# EAGLE board SparkFun_9DoF_ISM330DLC-MMC5983MA_Qwiic_Micro (EAGLE 9.6.2)
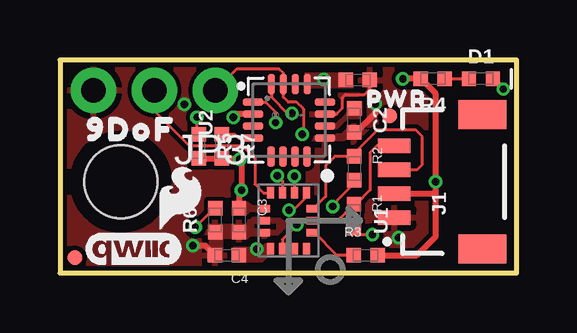
[diagram p0: board, top side]
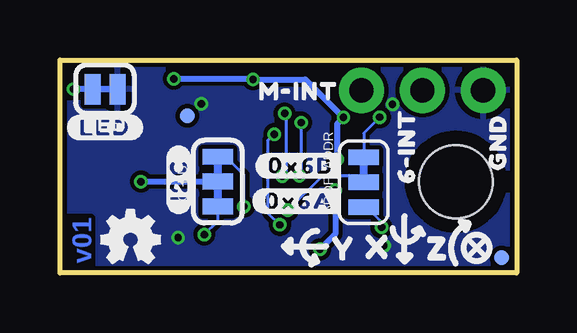
[diagram p1: board, bottom side, seen from below]

Size 19.05 x 8.89 mm. Coordinates in mm from the lower left corner, seen from the top.
Outline: 19.05,8.89 0,8.89 0,0 19.05,0 19.05,8.89
Copper layers (1*16): Top 0.035mm / dielectric 1.5mm / Bottom 0.035mm
Design rules "SparkFun-2-Layer-Minimum-JLCPCB": minimum track width 5mil, minimum drill 0.3mm, track to track 5mil, track to pad 5mil, pad to pad 5mil, via to via 5mil, smd to smd 5mil, copper to edge 7mil, drill to drill 7mil, minimum pad ring 5mil, minimum via ring 5mil, stop-mask expansion 2.5mil, vias tented up to drill 25mil, thermal gap 10mil
tRestrict: area 8.4,1.9 to 8.7,2

## Footprints (pad centres in the part's own frame; a part is rotated, then mirrored left to right if it is on the bottom)
SMT-JUMPER_3_1-NC_TRACE_SILK = smd 0.66 x 1.27: 1 -1.041,0; 2 0,0; 3 1.041,0
0402-TIGHT = smd 0.6 x 0.6: 1 -0.5,0; 2 0.5,0
0402-TIGHT' = smd 0.6 x 0.6: A -0.5,0; C 0.5,0
FIDUCIAL-MICRO = smd 0.635 x 0.635: 1 0,0
SMT-JUMPER_3_2-NC_TRACE_SILK = smd 0.66 x 1.27: 1 -1.041,0; 2 0,0; 3 1.041,0
JST04_1MM_RA = smd 0.6 x 1.35: 1 -1.5,0; 2 -0.5,0; 3 0.5,0; 4 1.5,0 | smd 1.2 x 2: NC1 2.8,-3.675; NC2 -2.8,-3.675
1X03_NO_SILK = drill 1.016 pad 1.88: 1 0,0; 2 2.54,0; 3 5.08,0
SMT-JUMPER_2_NC_TRACE_SILK = smd 0.66 x 1.27: 1 -0.521,0; 2 0.521,0
STAND-OFF-TIGHT = hole 3.048: 0,0
LGA-14L = smd 0.48 x 0.3: P1 -1.163,0.75; P2 -1.163,0.25; P3 -1.163,-0.25; P4 -1.163,-0.75; P8 1.163,-0.75; P9 1.163,-0.25; P10 1.163,0.25; P11 1.163,0.75 | smd 0.3 x 0.48: P5 -0.5,-1; P6 0,-1; P7 0.5,-1; P12 0.5,1; P13 0,1; P14 -0.5,1
LGA-16-3X3MM-4X4PINS = smd 0.3 x 0.85: 1 0.754,1.498; 2 0.254,1.498; 3 -0.246,1.498; 4 -0.746,1.498; 9 -0.746,-1.506; 10 -0.246,-1.506; 11 0.254,-1.506; 12 0.754,-1.506 | smd 0.85 x 0.3: 5 -1.508,0.746; 6 -1.508,0.246; 7 -1.508,-0.254; 8 -1.508,-0.754; 13 1.496,-0.764; 14 1.496,-0.264; 15 1.496,0.236; 16 1.496,0.736

## Placement (x,y rotation side)
6DOF_ADDR  JUMPER-SMT_3_1-NC_TRACE_SILK  [SMT-JUMPER_3_1-NC_TRACE_SILK]  6.38,3.78 90 bottom
C1  1.0uF  [0402-TIGHT]  12.42,8.05 0 top
C2  10uF  [0402-TIGHT]  12.27,6.38 270 top
C3  0.1uF  [0402-TIGHT]  7.47,2.2 270 top
C4  0.1uF  [0402-TIGHT]  6.96,0.74 180 top
D1  RED  [0402-TIGHT']  17.55,8.1 0 top
FD1  FIDUCIALUFIDUCIAL  [FIDUCIAL-MICRO]  0.64,0.64 0 bottom
FD2  FIDUCIALUFIDUCIAL  [FIDUCIAL-MICRO]  13.74,6.55 0 bottom
FID1  FIDUCIALUFIDUCIAL  [FIDUCIAL-MICRO]  0.64,0.64 0 top
FID2  FIDUCIALUFIDUCIAL  [FIDUCIAL-MICRO]  13.74,6.55 0 top
FRAME2  FRAME-LEDGER  [CREATIVE_COMMONS]  -19.05,-20.32 0 top  (outside the outline)
I2C_PU  S_MODE  [SMT-JUMPER_3_2-NC_TRACE_SILK]  12.47,3.81 90 bottom
J1  QWIIC_RIGHT_ANGLE  [JST04_1MM_RA]  13.94,3.81 90 top
JP3  IO  [1X03_NO_SILK]  6.48,7.62 180 top
LED  JUMPER-SMT_2_NC_TRACE_SILK  [SMT-JUMPER_2_NC_TRACE_SILK]  17.17,7.67 180 bottom
LOGO1  QWIIC_LOGO_4MM  [QWIIC_4MM]  3.07,0.99 0 top
LOGO2  OSHW-LOGOMINI  [OSHW-LOGO-MINI]  16.1,1.4 0 bottom
LOGO3  SFE_LOGO_NAMEBLANK  [BLANK]  -39.37,-21.59 0 top  (outside the outline)
R1  2.2k  [0402-TIGHT]  12.26,2.36 270 top
R2  2.2k  [0402-TIGHT]  12.27,4.37 270 top
R3  100k  [0402-TIGHT]  12.74,0.74 0 top
R4  1k  [0402-TIGHT]  15.54,8.1 180 top
R5  100k  [0402-TIGHT]  5.79,5.28 270 top
R6  100k  [0402-TIGHT]  6.48,2.21 90 top
R7  100k  [0402-TIGHT]  6.76,5.28 270 top
STANDOFF2  STAND-OFFTIGHT  [STAND-OFF-TIGHT]  2.54,3.81 0 top
U1  ISM330DHCX  [LGA-14L]  9.53,2.18 270 top
U2  MMC5983MA_QFN16  [LGA-16-3X3MM-4X4PINS]  9.55,6.38 90 top
U$1  [GND4]  0.79,5.46 90 bottom
U$2  [M#INT8]  9.08,7.58 0 bottom
U$3  [6#INT8]  4.6,5.31 90 bottom
U$4  [#0X6A#13]  9.07,3 0 bottom
U$5  [#0X6B#13]  9.02,4.47 0 bottom
U$6  [9DOF5985]  2.97,5.99 0 top
U$16  [#LED#11]  17.17,6.07 0 bottom
U$25  [#I2C#11]  14.1,3.89 90 bottom
U$28  [PWR8]  14.05,7.26 0 top
U$29  [SFE_LOGO_FLAME_.1]  5,3.15 0 top
U$37  [X2114]  5.77,1.07 0 bottom
U$38  [Y2115]  7.19,1.02 0 bottom
U$39  [Z2116]  3.28,1.02 0 bottom

## Library data of the parts
6DOF_ADDR I2C_PU LED = SparkFun-Jumpers
C1 = SparkFun-Capacitors; PROD_ID: CAP-12417
C2 = SparkFun-Capacitors; PROD_ID: CAP-14848
C3 C4 = SparkFun-Capacitors; PROD_ID: CAP-12416
D1 = ISM330DHCX
FD1 FD2 FID1 FID2 FRAME2 LOGO1-LOGO3 U$29 = SparkFun-Aesthetics
J1 = SparkFun-Connectors; PROD_ID: CONN-13694
JP3 = SparkFun-Connectors
R1 R2 = SparkFun-Resistors; PROD_ID: RES-14341
R3 R5-R7 = SparkFun-Resistors; PROD_ID: RES-13495
R4 = SparkFun-Resistors; PROD_ID: RES-14342
STANDOFF2 = SparkFun-Hardware
U1 = ISM330DHCX; PROD_ID: IC-16693
U2 = SparkFun-Sensors; PROD_ID: IC-16314
U$1-U$6 = LISMini
U$16 U$25 = bot
U$28 = top
U$37-U$39 = ISMTopMini

## Nets
3.3V: C1.1 C3.1 C4.1 I2C_PU.2 J1.2 R3.2 R4.2 R5.2 R7.2 U1.P5 U1.P8 U2.2 U2.13
!ISM_CS!: R3.1 U1.P12
!MAG_CS!: R7.1 U2.4
CAP: C2.1 U2.10
GND: C1.2 C2.2 C3.2 C4.2 J1.1 JP3.3 LED.1 R6.1 U1.P6 U1.P7 U2.9 U2.11
ISM_INT: JP3.2 U1.P4
ISM_SCL: U1.P3 U2.1
ISM_SDA: U1.P2 U2.16
MAG_INT: JP3.1 U1.P9 U2.15
N$1: 6DOF_ADDR.3 R5.1
N$2: D1.A R4.1
N$3: D1.C LED.2
N$5: I2C_PU.1 R1.2
N$6: I2C_PU.3 R2.2
N$7: 6DOF_ADDR.1 R6.2
POCI/SA0: 6DOF_ADDR.2 U1.P1
SCL: J1.4 R1.1 U1.P13
SDA: J1.3 R2.1 U1.P14

## Tracks (layer width: path | path; a pad name or v marks a point on that pad's centre or on a via)
3.3V  (via drill 0.3)
  Top 0.254: 15.67,3.35 v15.67,3.81 15.67,7.48 R4.2 v14.3,8.1 | R5.2 R7.2 6.79,4.75 v7.49,4.75 7.57,4.67 v7.57,3.45 7.47,3.35 C3.1 | U2.2 7.34,6.63 7.23,6.51 v7.23,6.49 | R3.2 14.88,0.74 15.67,1.52 15.67,3.35 | 15.67,3.35 15.63,3.31 J1.2
  Bottom 0.254: v14.3,8.1 11.02,8.1 v11,8.08 8.81,8.08 v7.23,6.49 7.49,6.22 v7.49,4.75 | v15.67,3.81 I2C_PU.2 | v7.57,3.45 7.57,1.63 v8.2,0.99
  pour Top (isolate 0.178, no thermals): 10.21,8.33 10.24,8.36 12.22,8.36 12.22,7.72 10.21,7.72
  pour Top (isolate 0.178, no thermals): 8.66,2.54 7.9,2.54 7.77,2.41 7.21,2.41 7.21,2.97 7.85,2.97 8,2.82 8.66,2.82
  pour Top (isolate 0.178, no thermals): 8.56,1.22 8.41,1.07 7.24,1.07 7.24,0.46 8.46,0.46 8.92,0.91 8.92,1.22
!ISM_CS!
  Top 0.127: R3.1 11.56,0.74 10.61,1.68 U1.P12
!MAG_CS!
  Top 0.127: U2.4 7.45,5.63 7.3,5.78 R7.1
CAP
  pour Top (isolate 0.178, no thermals): 10.82,6.25 11.53,6.25 11.94,6.65 11.94,7.16 12.57,7.16 12.6,7.14 12.6,6.58 12.45,6.43 11.99,6.43 11.56,5.99 10.85,5.99 10.82,6.02
GND  (via drill 0.3)
  Top 0.127: U2.11 11.53,6.63 11.78,6.88 11.78,7.25 11.79,7.26 11.79,7.32 11.91,7.44 12.7,7.44 12.92,7.66 C1.2
  Top 0.254: v5.54,1.14 6.05,1.14 C4.2 | C2.2 12.37,5.88 13.16,6.66 v13.16,7.06
  other vias: 14.12,1.47 5.18,7.04
  pour Bottom (isolate 0.178): 19.05,0 19.05,8.89 0,8.89 0,0
  pour Top (isolate 0.178, rank 2): 19.05,0 19.05,8.89 0,8.89 0,0
  pour Top (isolate 0.178, no thermals): 10.9,5.77 11.71,5.77 12.09,6.15 12.55,6.15 12.55,5.56 11.56,5.56 11.51,5.51 10.9,5.51
  pour Top (isolate 0.178, no thermals): 7.95,1.55 8.76,1.55 8.76,1.83 8.1,1.83 8.1,2.06 8.76,2.06 8.76,2.31 8.03,2.31 7.75,2.03 6.25,2.03 6.22,2.01 6.22,0.46 6.81,0.46 6.81,1.45 7.85,1.45
ISM_INT
  Top 0.127: JP3.2 3.94,6.77 5.41,5.29 7.62,5.29 8.13,4.78 8.13,3.71 8.49,3.35 U1.P4
ISM_SCL  (via drill 0.3)
  Top 0.127: U2.1 8.57,7.13 8.99,6.71 v8.99,6.27 | U1.P3 9.28,3.86 9.07,4.06 v9.06,4.06
  Bottom 0.127: v8.99,6.27 8.99,4.13 v9.06,4.06
ISM_SDA  (via drill 0.3)
  Top 0.127: U2.16 8.81,7.34 9.5,6.66 v9.68,6.66 | v9.78,4.04 U1.P2
  Bottom 0.127: v9.78,4.04 9.63,4.19 9.63,6.6 v9.68,6.66
MAG_INT  (via drill 0.3)
  Top 0.127: JP3.1 7.37,8.51 9.14,8.51 9.31,8.34 U2.15 9.31,7.33 9.53,7.12 9.87,7.12 10.15,6.85 10.15,5.83 v10.11,5.79 | U1.P9 9.27,1.4 v9.88,2.01
  Bottom 0.127: v10.11,5.79 10.36,5.54 10.36,2.49 v9.88,2.01
N$1  (via drill 0.3)
  Top 0.127: R5.1 5.71,5.86 v5.71,6.5
  Bottom 0.127: v5.71,6.5 6.38,5.84 6DOF_ADDR.3
N$2
  Top 0.127: R4.1 D1.A
N$3  (via drill 0.3)
  Top 0.254: v18.49,7.67 D1.C
  Bottom 0.254: LED.2 v18.49,7.67
N$5  (via drill 0.3)
  Top 0.127: R1.2 12.52,1.6 v13.03,1.6
  Bottom 0.127: v13.03,1.6 12.46,2.17 I2C_PU.1
N$6  (via drill 0.3)
  Top 0.127: 11.72,3.19 | 11.72,3.19 11.38,2.85 v11.38,2.77 | R2.2 12.28,3.74 11.72,3.19
  Bottom 0.127: I2C_PU.3 12.14,4.85 11.38,4.08 v11.38,2.77
N$7  (via drill 0.3)
  Top 0.127: R6.2 6.44,2.71 v5.64,1.91
  Bottom 0.127: v5.64,1.91 5.64,2.13 6.25,2.74 6DOF_ADDR.1
POCI/SA0  (via drill 0.3)
  Top 0.127: U1.P1 10.28,3.16 9.73,2.62 v9.55,2.62
  Bottom 0.127: 6DOF_ADDR.2 6.7,3.79 6.99,4.08 8.09,4.08 v9.55,2.62
SCL
  Top 0.127: J1.4 13.21,5.31 12.93,5.03 12.93,3.45 12.34,2.86 R1.1 11.58,2.18 U1.P13
SDA
  Top 0.127: J1.3 14.9,4.31 15.11,4.52 15.11,5.69 14.83,5.97 13.23,5.97 12.28,5.01 R2.1 11.46,4.87 11.07,4.48 11.07,3.18 10.58,2.68 U1.P14

## Text on the board
Bottom: v01
Measures: Units in Inches
tDocu: Elias Santistevan